# Altium PCB stm32dev.PcbDoc
Units mm, origin at the board's own origin, x right, y up, seen from the top; angles counter-clockwise.
Board outline 57 x 44 mm, 4 copper layers (Top Layer (Signal), Int1 (GND), Int2 (PWR), Bottom Layer (Signal)), stack 1.57 mm thick; 42 components, 50 nets, 191 pads, 142 vias.
Unrouted connection lines stored in the file: 5.
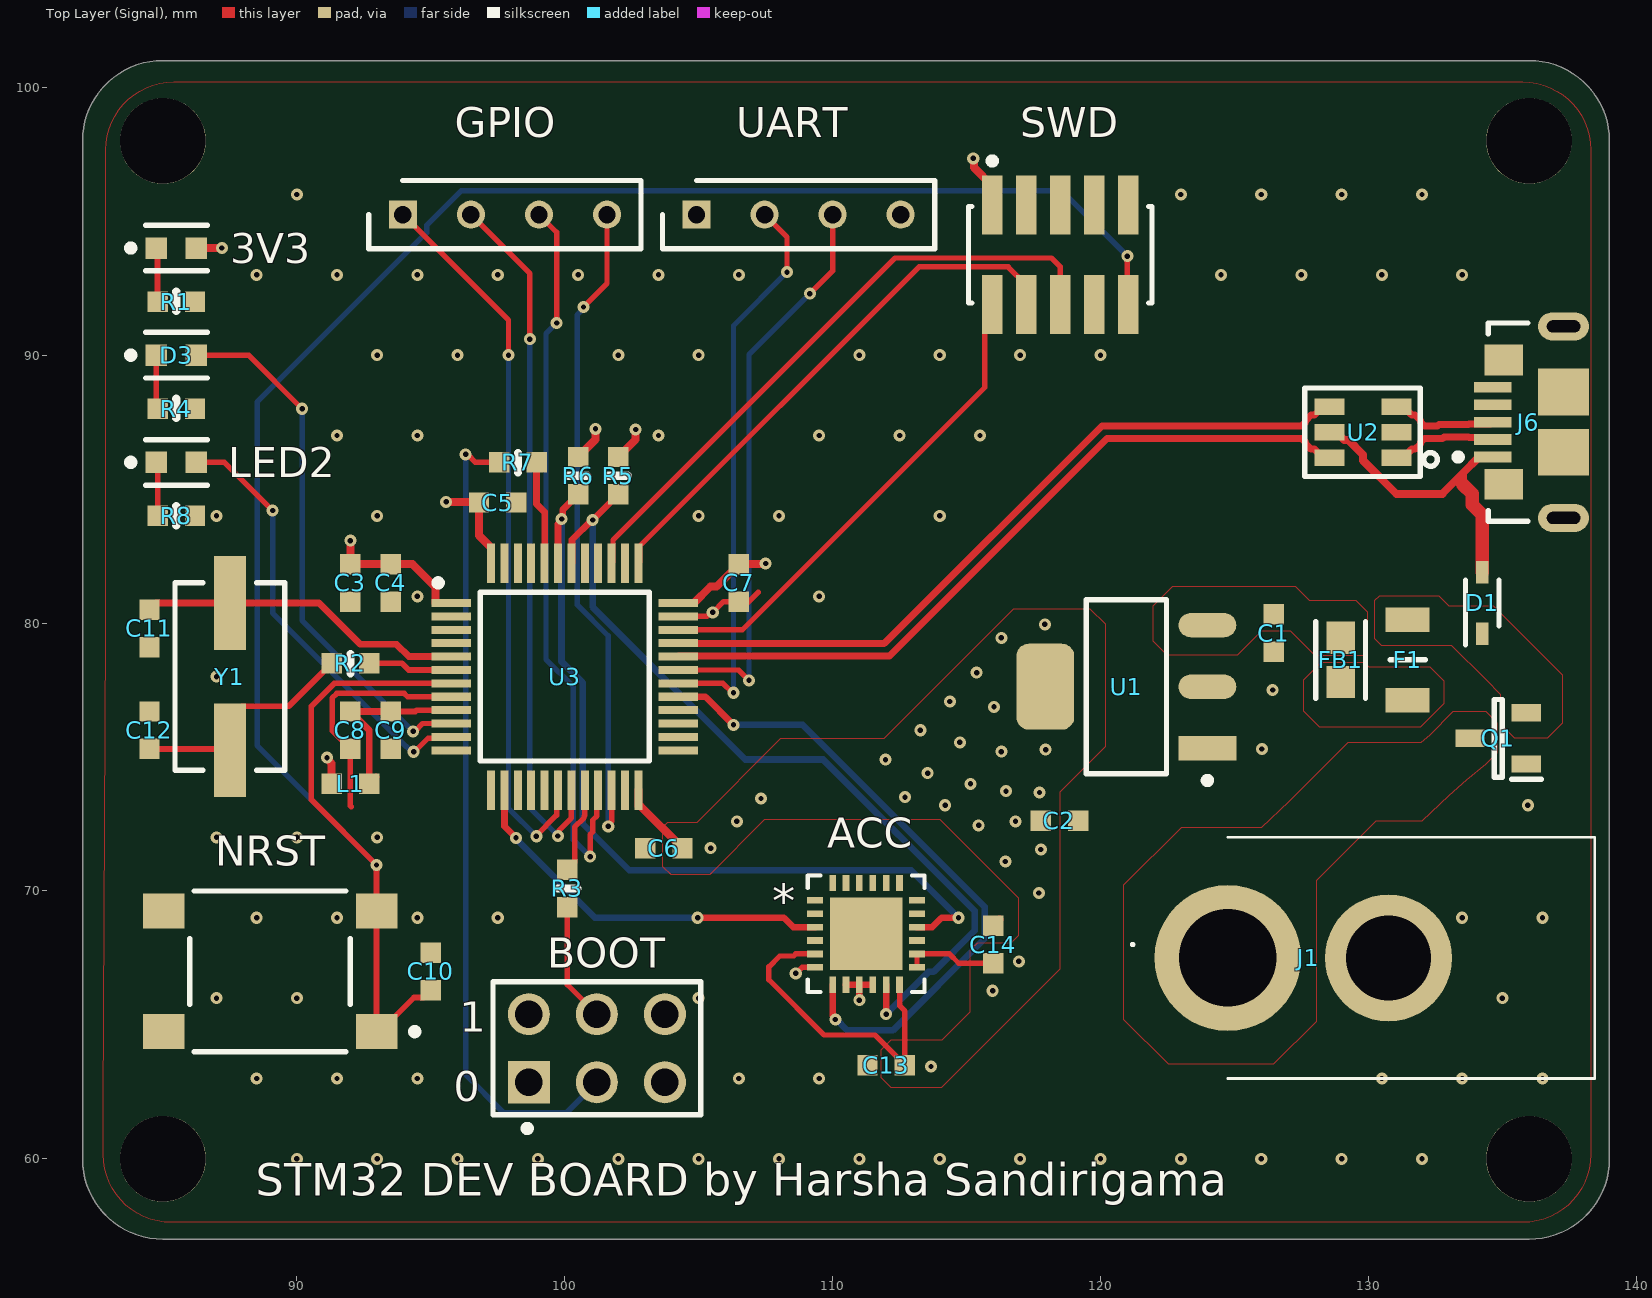
[diagram p0: Top Layer (Signal) view]
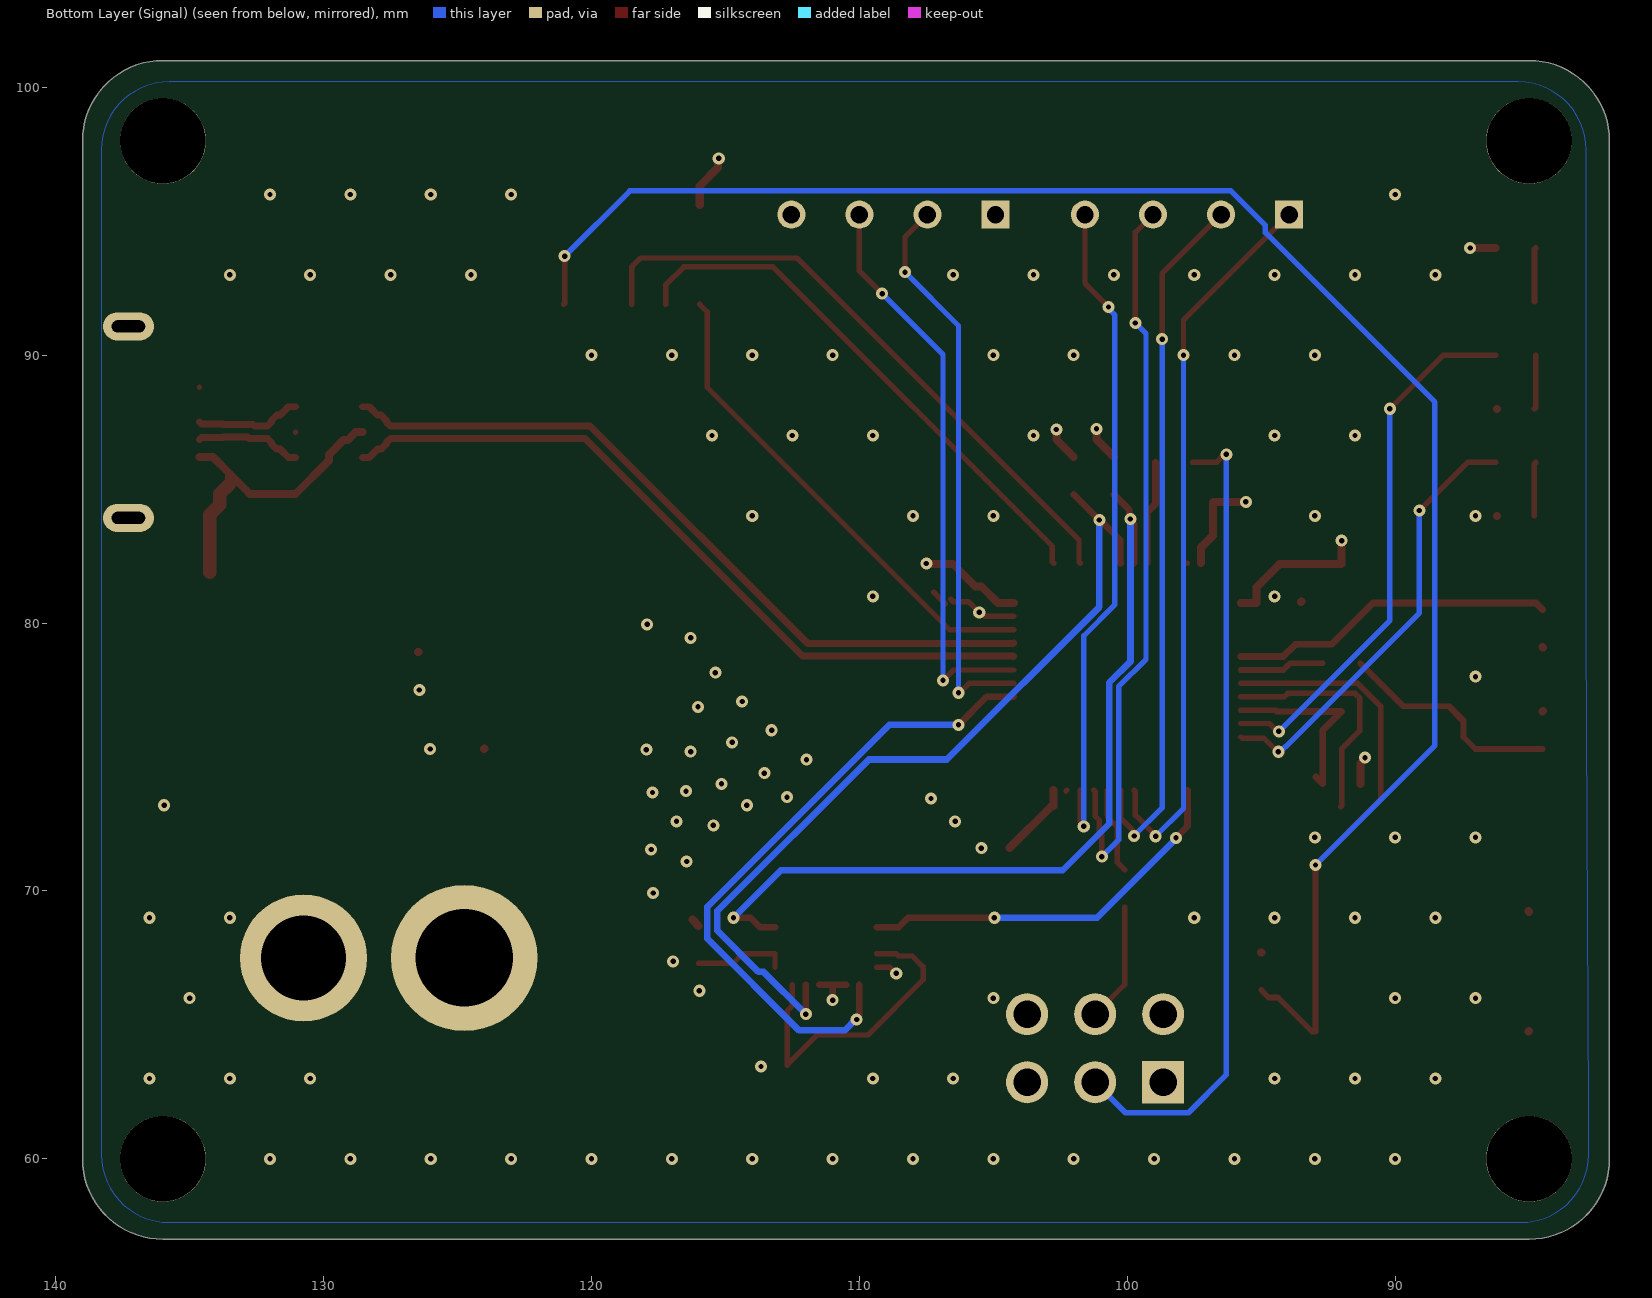
[diagram p1: Bottom Layer (Signal) view, seen from below]

## Layer stack, top to bottom
Top Solder: solder mask 0.0254, SM-001, Dk 4
Top Layer (Signal): signal copper 0.035
Dielectric 1: prepreg 0.2, PP-017, Dk 4.6
Int1 (GND): signal copper 0.0175
Dielectric 3: core 1.065, Core-039, Dk 4.6
Int2 (PWR): signal copper 0.0175
Dielectric 5: prepreg 0.2, PP-017, Dk 4.6
Bottom Layer (Signal): signal copper 0.035
Bottom Solder: solder mask 0.0254, SM-001, Dk 4

## Board outline
82,60 82,98 cw(c85,98) 85,101 136,101 cw(c136,98) 139,98 139,60 cw(c136,60) 136,57 85,57 cw(c85,60)

## Design rules (kind name [scope] priority, off if disabled: settings)
AssemblyTestPointUsage [All] p0: scope1count=1 scope1_0_kind=Board scope1_0_value=Board scope2count=1 scope2_0_kind=Board scope2_0_value=Board commentlength=0
AssemblyTestpoint [All] p0: scope1count=1 scope1_0_kind=Board scope1_0_value=Board scope2count=1 scope2_0_kind=Board scope2_0_value=Board commentlength=0
BoardOutlineClearance [All] p0: scope1count=1 scope1_0_kind=Board scope1_0_value=Board scope2count=1 scope2_0_kind=Board scope2_0_value=Board commentlength=0 gap=0.3
BoardOutlineClearance [All] p1: gap=0.3 ignorepadtopadclearanceinfootprint=FALSE
Clearance [All] p0: scope1count=1 scope1_0_kind=Board scope1_0_value=Board scope2count=1 scope2_0_kind=Board scope2_0_value=Board commentlength=0 gap=0.254
Clearance [All] p1: gap=0.254 ignorepadtopadclearanceinfootprint=TRUE except(0.127: Arc-Arc Arc-Track Track-Track SMDPad-SMDPad; 0.2: Arc-SMDPad Track-SMDPad)
ComponentClearance [All] p0: scope1count=1 scope1_0_kind=Board scope1_0_value=Board scope2count=1 scope2_0_kind=Board scope2_0_value=Board commentlength=0 gap=0.102 collisioncheckmode=3
ComponentClearance [All] p1: gap=0.102 collisioncheckmode=3 verticalgap=0.102 showdistances=TRUE
DiffPairsRouting [All] p0: scope1count=1 scope1_0_kind=Board scope1_0_value=Board scope2count=1 scope2_0_kind=Board scope2_0_value=Board commentlength=0
DiffPairsRouting [All] p1: maxlimit=0.203 minlimit=0.102 mostfreqgap=0.203 toplayer_mingap=0.203 toplayer_minwidth=0.26 toplayer_maxwidth=0.26 toplayer_prefwidth=0.26 bottomlayer_mingap=0.203 bottomlayer_minwidth=0.26 bottomlayer_maxwidth=0.26 bottomlayer_prefwidth=0.26 impedanceprofiledriven=TRUE impedanceprofileid={1C4CB671-A8B7-4B95-AC9F-C94278357B87} impedanceprofilevalue=90.000000 maxuncoupledlength=12.7
FabricationTestPointUsage [All] p0: scope1count=1 scope1_0_kind=Board scope1_0_value=Board scope2count=1 scope2_0_kind=Board scope2_0_value=Board commentlength=0 valid=0 allowmultiple=FALSE
FabricationTestpoint [All] p0: scope1count=1 scope1_0_kind=Board scope1_0_value=Board scope2count=1 scope2_0_kind=Board scope2_0_value=Board commentlength=0 side=3 testpointundercomponent=TRUE minsize=1.016 maxsize=2.54 preferedsize=1.524 minholesize=0 maxholesize=1.016 preferedholesize=0.813 testpointgrid=0.025
FanoutControl Fanout_Default [All] p0: scope1count=1 scope1_0_kind=Board scope1_0_value=Board scope2count=1 scope2_0_kind=Board scope2_0_value=Board commentlength=30 // Fanout_Default (Default Rule)
FanoutControl Fanout_Small [All] p0 off: scope1count=1 scope1_0_kind=Board scope1_0_value=Board scope2count=1 scope2_0_kind=Board scope2_0_value=Board commentlength=84 // Protel DXP Scope 1 Expression Was: (CompPinCount < 5)   Fanout_Small (Default Rule)
FanoutControl Fanout_SOIC [All] p0 off: scope1count=1 scope1_0_kind=Board scope1_0_value=Board scope2count=1 scope2_0_kind=Board scope2_0_value=Board commentlength=71 // Protel DXP Scope 1 Expression Was: IsSOIC   Fanout_SOIC (Default Rule)
FanoutControl Fanout_LCC [All] p0 off: scope1count=1 scope1_0_kind=Board scope1_0_value=Board scope2count=1 scope2_0_kind=Board scope2_0_value=Board commentlength=69 // Protel DXP Scope 1 Expression Was: IsLCC   Fanout_LCC (Default Rule)
FanoutControl Fanout_BGA [All] p0 off: scope1count=1 scope1_0_kind=Board scope1_0_value=Board scope2count=1 scope2_0_kind=Board scope2_0_value=Board commentlength=69 // Protel DXP Scope 1 Expression Was: IsBGA   Fanout_BGA (Default Rule)
Height [All] p0: scope1count=1 scope1_0_kind=Board scope1_0_value=Board scope2count=1 scope2_0_kind=Board scope2_0_value=Board commentlength=0
Height [All] p1: minheight=0 maxheight=1816.048 prefheight=12.7
HoleSize [All] p0: scope1count=1 scope1_0_kind=Board scope1_0_value=Board scope2count=1 scope2_0_kind=Board scope2_0_value=Board commentlength=0 absolutevalues=TRUE maxlimit=6.3 minlimit=0.2 maxpercent=80.000 minpercent=20.000
HoleSize [All] p1: absolutevalues=TRUE maxlimit=6.3 minlimit=0.2 maxpercent=80.000 minpercent=20.000
HoleToHoleClearance [All] p0: scope1count=1 scope1_0_kind=Board scope1_0_value=Board scope2count=1 scope2_0_kind=Board scope2_0_value=Board commentlength=0
HoleToHoleClearance [All] p1: gap=0.5 allowstackedmicrovias=FALSE
LayerPairs [All] p0: scope1count=1 scope1_0_kind=Board scope1_0_value=Board scope2count=1 scope2_0_kind=Board scope2_0_value=Board commentlength=0 enforce=TRUE
MinimumAnnularRing [All] p0: scope1count=1 scope1_0_kind=Board scope1_0_value=Board scope2count=1 scope2_0_kind=Board scope2_0_value=Board commentlength=0 minimumring=0.13
MinimumAnnularRing [All] p1: minimumring=0.13
MinimumSolderMaskSliver [All] p0: scope1count=1 scope1_0_kind=Board scope1_0_value=Board scope2count=1 scope2_0_kind=Board scope2_0_value=Board commentlength=0
MinimumSolderMaskSliver [All] p1: minsoldermaskwidth=0
NetAntennae [All] p0: scope1count=1 scope1_0_kind=Board scope1_0_value=Board scope2count=1 scope2_0_kind=Board scope2_0_value=Board commentlength=0
PasteMaskExpansion [All] p0: scope1count=1 scope1_0_kind=Board scope1_0_value=Board scope2count=1 scope2_0_kind=Board scope2_0_value=Board commentlength=0 expansion=0
PlaneClearance [All] p0: scope1count=1 scope1_0_kind=Board scope1_0_value=Board scope2count=1 scope2_0_kind=Board scope2_0_value=Board commentlength=0 clearance=0.102
PlaneClearance [All] p1: clearance=0.102
PlaneConnect [All] p0: scope1count=1 scope1_0_kind=Board scope1_0_value=Board scope2count=1 scope2_0_kind=Board scope2_0_value=Board commentlength=0 planeconnectstyle=Relief reliefexpansion=0.3 reliefentries=4 reliefconductorwidth=0.102 reliefairgap=0.102
PlaneConnect PlaneConnectPowerPads [All] p0: scope1count=1 scope1_0_kind=PadClass scope1_0_value=PowerPads scope2count=1 scope2_0_kind=Board scope2_0_value=Board commentlength=0 planeconnectstyle=Direct reliefexpansion=0.508 reliefentries=4 reliefconductorwidth=0.254 reliefairgap=0.254
PlaneConnect PlaneConnectPowerPads [InPadClass('PowerPads')] p1: planeconnectstyle=Direct reliefexpansion=0.508 reliefentries=4 reliefconductorwidth=0.254 reliefairgap=0.254
PlaneConnect [All] p2: pad.planeconnectstyle=Relief pad.reliefexpansion=0.3 pad.reliefentries=4 pad.reliefconductorwidth=0.102 pad.reliefairgap=0.102 via.planeconnectstyle=Direct via.reliefexpansion=0.3 via.reliefentries=4 via.reliefconductorwidth=0.127 via.reliefairgap=0.127
PolygonConnect [All] p0: scope1count=1 scope1_0_kind=Board scope1_0_value=Board scope2count=1 scope2_0_kind=Board scope2_0_value=Board commentlength=0 connectstyle=Relief reliefconductorwidth=0.2 reliefentries=4 polygonreliefangle="90 Angle"
PolygonConnect PolygonConnectPowerPads [All] p0 off: scope1count=1 scope1_0_kind=Board scope1_0_value=Board scope2count=1 scope2_0_kind=Board scope2_0_value=Board commentlength=64 connectstyle=Direct reliefconductorwidth=0.254 reliefentries=4 polygonreliefangle="90 Angle" // Protel DXP Scope 2 Expression Was: (InPadClass('PowerPads'))
PolygonConnect PolygonConnectPowerPads [All vs (InPadClass('PowerPads'))] p1: connectstyle=Direct reliefconductorwidth=0.254 reliefentries=4 polygonreliefangle="90 Angle" airgapwidth=0.254
PolygonConnect [All] p2: thpad.connectstyle=Relief thpad.reliefconductorwidth=0.2 thpad.reliefentries=4 thpad.polygonreliefangle="90 Angle" thpad.airgapwidth=0.2 smdpad.connectstyle=Relief smdpad.reliefconductorwidth=0.2 smdpad.reliefentries=4 smdpad.polygonreliefangle="90 Angle" smdpad.airgapwidth=0.2 via.connectstyle=Direct via.reliefconductorwidth=0.127 via.reliefentries=4 via.polygonreliefangle="90 Angle" via.airgapwidth=0.127
RoutingCorners [All] p0: scope1count=1 scope1_0_kind=Board scope1_0_value=Board scope2count=1 scope2_0_kind=Board scope2_0_value=Board commentlength=0 cornerstyle=45-Degree minsetback=2.54 maxsetback=2.54
RoutingLayers [All] p0: scope1count=1 scope1_0_kind=Board scope1_0_value=Board scope2count=1 scope2_0_kind=Board scope2_0_value=Board commentlength=0 top layer=Automatic mid layer 1=Automatic mid layer 2=Automatic bottom layer=Automatic
RoutingPriority [All] p0: scope1count=1 scope1_0_kind=Board scope1_0_value=Board scope2count=1 scope2_0_kind=Board scope2_0_value=Board commentlength=0
RoutingTopology [All] p0: scope1count=1 scope1_0_kind=Board scope1_0_value=Board scope2count=1 scope2_0_kind=Board scope2_0_value=Board commentlength=0 topology=Shortest
RoutingVias [All] p0: scope1count=1 scope1_0_kind=Board scope1_0_value=Board scope2count=1 scope2_0_kind=Board scope2_0_value=Board commentlength=0 holewidth=0.2 width=0.45 viastyle="Through Hole" minholewidth=0.2 minwidth=0.45 maxholewidth=6.3 maxwidth=6.55
RoutingVias [All] p1: holewidth=0.2 width=0.45 viastyle="Through Hole" minholewidth=0.2 minwidth=0.45 maxholewidth=6.3 maxwidth=6.55
ShortCircuit [All] p0: scope1count=1 scope1_0_kind=Board scope1_0_value=Board scope2count=1 scope2_0_kind=Board scope2_0_value=Board commentlength=0 allowed=FALSE
SilkToBoardRegionClearance [All] p0: scope1count=1 scope1_0_kind=Board scope1_0_value=Board scope2count=1 scope2_0_kind=Board scope2_0_value=Board commentlength=0
SilkToSilkClearance [All] p0: scope1count=1 scope1_0_kind=Board scope1_0_value=Board scope2count=1 scope2_0_kind=Board scope2_0_value=Board commentlength=0
SilkToSilkClearance [All] p1: silktosilkclearance=0
SilkToSolderMaskClearance [All] p0 off: scope1count=1 scope1_0_kind=Board scope1_0_value=Board scope2count=1 scope2_0_kind=Board scope2_0_value=Board commentlength=44 // Protel DXP Scope 1 Expression Was: IsPad
SilkToSolderMaskClearance [IsPad] p1: minsilkscreentomaskgap=0.102 clearancetoexposedcopper=TRUE
SolderMaskExpansion [All] p0: scope1count=1 scope1_0_kind=Board scope1_0_value=Board scope2count=1 scope2_0_kind=Board scope2_0_value=Board commentlength=0 expansion=0.075
SolderMaskExpansion [All] p1: expansion=0.075 istentingtop=FALSE
UnRoutedNet [All] p0: scope1count=1 scope1_0_kind=Board scope1_0_value=Board scope2count=1 scope2_0_kind=Board scope2_0_value=Board commentlength=0
UnpouredPolygon [All] p0: scope1count=1 scope1_0_kind=Board scope1_0_value=Board scope2count=1 scope2_0_kind=Board scope2_0_value=Board commentlength=0
Width [All] p0: scope1count=1 scope1_0_kind=Board scope1_0_value=Board scope2count=1 scope2_0_kind=Board scope2_0_value=Board commentlength=0 maxlimit=1816.048 minlimit=0.102 preferedwidth=0.3
Width [All] p1: maxlimit=1816.048 minlimit=0.102 preferedwidth=0.3 toplayer_minwidth=0.2 midlayer1_prefwidth=0.102 midlayer2_prefwidth=0.102 bottomlayer_minwidth=0.2 minimp=50.000000 maximp=50.000000 favimp=50.000000
20 further rules are at their usual default settings.

## Classes and differential pairs
differential pair USB_DATA: +USB_DATA_P -USB_DATA_N
differential pair " ": +USB_CONN_D_P -USB_CONN_D_N

## Components (designator, comment, footprint, x,y, rotation, side; value= is the part's Value field where it differs from the comment)
3V3 "LTST-C191KFKT" Lite-On_0_MFG 85.5,94 r0 top (schematic designator D2)
ACC "IIS328DQ" QFN-24_4X4MM_STM 111.25,68.4 r0 top (schematic designator U4)
BOOT "67996-406HLF" Amphenol_ICC_-_FCI_0_MFG 101.2,64.13 r0 top (schematic designator J7)
C1 "4.7uF" "0603C - HD" 126.465,79.625 r90 top
C2 "4.7uF" "0603C - HD" 118.465,72.625 r180 top
C3 "10uF" "0603C - HD" 92,81.5 r90 top
C4 "100nF" "0603C - HD" 93.5,81.5 r90 top
C5 "100nF" "0603C - HD" 97.5,84.5 r180 top
C6 "100nF" "0603C - HD" 103.699,71.6 r0 top
C7 "100nF" "0603C - HD" 106.5,81.5 r90 top
C8 "1uF" "0603C - HD" 92,76 r90 top
C9 "10nF" "0603C - HD" 93.5,76 r90 top
C10 "10nF" "0603C - HD" 95,67 r90 top
C11 "27pF" "0603C - HD" 84.5,79.802 r90 top
C12 "27pF" "0603C - HD" 84.5,76 r270 top
C13 "10uF" "0603C - HD" 112,63.5 r0 top
C14 "100nF" "0603C - HD" 116,68 r270 top
D1 "PMEG4005CEJX" SODFL2512X80N 134.25,80.75 r90 top
D3 "LTST-C191KFKT" Lite-On_0_MFG 85.5,90 r0 top
F1 "250mA" FUSC3115X66N 131.465,78.625 r270 top
FB1 "MPZ1608Y101BTA00" TDK_MPZ1608-0_8_IPC_A 128.965,78.625 r90 top
GPIO "TS-104-T-AA" HDRV4W46P0X254_1X4_1016X254X808P 93.96,95.25 r0 top (schematic designator J2)
J1 "12V" PJ037AH 124.75,67.5 r180 top
J6 "USB3075-30-A" Global_Connector_Technology_USB3075-30-A_0 137.25,87.5 r90 top
L1 "39nH" "0603L - HD" 92,74 r0 top
LED2 "LTST-C191KFKT" Lite-On_0_MFG 85.5,86 r0 top (schematic designator D4)
NRST "PTS645SM43SMTR92LFS" "C&K_0_MFG - duplicate" 89,67 r180 top (schematic designator SW1)
Q1 "MOSFET P-CH" SOT96P240X110-3N 134.85,75.7 r180 top
R1 "RMCF0603FT1K50" "0603R - HD" 85.5,92 r180 top
R2 "47R" "0603R - HD" 92,78.5 r0 top
R3 "RNCF0603BTE10K0" "0603R - HD" 100.1,70.098 r90 top
R4 "RMCF0603FT1K50" "0603R - HD" 85.5,88 r180 top
R5 "RMCF0603FT2K20" "0603R - HD" 102,85.5 r270 top
R6 "RMCF0603FT2K20" "0603R - HD" 100.5,85.5 r270 top
R7 "RNCF0603BTE10K0" "0603R - HD" 98.251,86 r0 top
R8 "RMCF0603FT1K50" "0603R - HD" 85.5,84 r180 top
SWD "GRPB052VWQS-RC" Sullins_GRPB052VWQS-RC_MFG 118.5,93.75 r0 top (schematic designator J5)
U1 "ZLDO1117G33TA" Diodes_SOT223_IPC_A 120.965,77.625 r180 top
U2 "82400102" SOT23_6L 129.8,87.125 r180 top
U3 "STM32L151C8T6A" QFP50P900X900X160-48N 100,78 r0 top
UART "TS-104-T-AA" HDRV4W46P0X254_1X4_1016X254X808P 104.92,95.25 r0 top (schematic designator J3)
Y1 "16MHz" ECS_Inc._ECS-160-20-3X-TR_0 87.5,78 r270 top

## Footprints (in the part's own frame and the unit in brackets; to place one, negate y for a bottom-side part, rotate by r counter-clockwise, add the part's x,y. Pads: shape width x height; smd on the part's side, far side on the other; paste and mask are expansions set on the pad)
"0603C - HD" [mil] "Capacitor 0603 [Imperial]"
  rect 30x30 smd: 1(-27.5,0) 2(27.5,0)
"0603L - HD" [mil] "Inductor 0603 [Imperial]"
  rect 30x30 smd: 1(-27.5,0) 2(27.5,0)
"0603R - HD" [mil]
  rect 30x30 smd: 1(-27.5,0) 2(27.5,0)
  silkscreen extent 0,-15 0,14
Amphenol_ICC_-_FCI_0_MFG [mm]
  rect 1.57x1.57 hole 1.02 paste-1000 mask+0: 1(-2.54,-1.27)
  round 1.57 hole 1.02 paste-1000 mask+0: 2(-2.54,1.27) 3(0,-1.27) 4(0,1.27) 5(2.54,-1.27) 6(2.54,1.27)
  silkscreen extent -3.87,-3.12 3.87,2.48
"C&K_0_MFG - duplicate" [mm]
  rect 1.55x1.3 smd paste+0 mask+0: 1(-3.975,2.25) 2(3.975,2.25) 3(-3.975,-2.25) 4(3.975,-2.25)
  silkscreen extent -5.53,-3 3,3
Diodes_SOT223_IPC_A [mm]
  rect 2.16x0.912 smd paste+0 mask+0: 1(-3.026,2.3)
  rrect100% 2.16x0.912 smd paste+0 mask+0: 2(-3.026,0) 3(-3.026,-2.3)
  rrect42% 2.16x3.212 smd paste+0 mask+0: 4(3.026,0)
  silkscreen extent -3.15,-3.25 1.5,3.62
ECS_Inc._ECS-160-20-3X-TR_0 [mm]
  rect 3.5x1.2 smd paste+0 mask+0: 1(-2.75,0) 2(2.75,0)
  silkscreen extent -3.5,-2.05 3.5,2.05
FUSC3115X66N [mm]
  rect 0.92x1.65 smd: 1(-1.505,0) 2(1.505,0)
  silkscreen extent 0,-0.66 0,0.66
Global_Connector_Technology_USB3075-30-A_0 [mm]
  rect 0.4x1.4 smd paste+0 mask+0: 1(-1.3,2.615) 2(-0.65,2.615) 3(0,2.615) 4(0.65,2.615) 5(1.3,2.615)
  rect 1.15x1.45 smd paste+0 mask+0: 6(-2.32,2.195) 7(2.32,2.195)
  oval 1.05x1.9 hole 1.25 slot 0.45 at 0 deg paste-1000 mask+0: 8(-3.575,-0.035) 11(3.575,-0.035)
  rect 1.75x1.9 smd paste+0 mask+0: 9(-1.125,-0.035) 10(1.125,-0.035)
  silkscreen extent -3.7,1.3 3.7,4.02
HDRV4W46P0X254_1X4_1016X254X808P [mm]
  rect 1.05x1.05 hole 0.65: 1(0,0)
  round 1.05 hole 0.65: 2(2.54,0) 3(5.08,0) 4(7.62,0)
  silkscreen extent -1.27,-1.27 8.89,1.27
Lite-On_0_MFG [mm]
  rect 0.8x0.8 smd paste+0 mask+0: 1(-0.75,0) 2(0.75,0)
  silkscreen extent -1.82,-0.85 1.15,0.85
PJ037AH [mm]
  round 5.46 hole 3.64: 1(0,0)
  round 4.74 hole 3.16: 2(-6,0)
  silkscreen extent -13.7,-4.5 3.6,4.5
QFN-24_4X4MM_STM [mm]
  rect 0.6x0.25 smd paste+0 mask+0: 1(-1.9,1.25) 2(-1.9,0.75) 3(-1.9,0.25) 4(-1.9,-0.25) 5(-1.9,-0.75) 6(-1.9,-1.25) 13(1.9,-1.25) 14(1.9,-0.75) 15(1.9,-0.25) 16(1.9,0.25) 17(1.9,0.75) 18(1.9,1.25)
  rect 0.25x0.6 smd paste+0 mask+0: 7(-1.25,-1.9) 8(-0.75,-1.9) 9(-0.25,-1.9) 10(0.25,-1.9) 11(0.75,-1.9) 12(1.25,-1.9) 19(1.25,1.9) 20(0.75,1.9) 21(0.25,1.9) 22(-0.25,1.9) 23(-0.75,1.9) 24(-1.25,1.9)
  rect 2.7x2.7 smd paste-1.337 mask+0: 25(0,0)
  silkscreen extent -2.18,-2.18 2.18,2.18
QFP50P900X900X160-48N [mm]
  rect 1.475x0.3 smd: 1(-4.238,2.75) 2(-4.238,2.25) 3(-4.238,1.75) 4(-4.238,1.25) 5(-4.238,0.75) 6(-4.238,0.25) 7(-4.238,-0.25) 8(-4.238,-0.75) 9(-4.238,-1.25) 10(-4.238,-1.75) 11(-4.238,-2.25) 12(-4.238,-2.75) 25(4.238,-2.75) 26(4.238,-2.25) 27(4.238,-1.75) 28(4.238,-1.25) 29(4.238,-0.75) 30(4.238,-0.25) 31(4.238,0.25) 32(4.238,0.75) 33(4.238,1.25) 34(4.238,1.75) 35(4.238,2.25) 36(4.238,2.75)
  rect 0.3x1.475 smd: 13(-2.75,-4.238) 14(-2.25,-4.238) 15(-1.75,-4.238) 16(-1.25,-4.238) 17(-0.75,-4.238) 18(-0.25,-4.238) 19(0.25,-4.238) 20(0.75,-4.238) 21(1.25,-4.238) 22(1.75,-4.238) 23(2.25,-4.238) 24(2.75,-4.238) 37(2.75,4.238) 38(2.25,4.238) 39(1.75,4.238) 40(1.25,4.238) 41(0.75,4.238) 42(0.25,4.238) 43(-0.25,4.238) 44(-0.75,4.238) 45(-1.25,4.238) 46(-1.75,4.238) 47(-2.25,4.238) 48(-2.75,4.238)
  silkscreen extent -4.85,-3.15 3.15,3.62
SODFL2512X80N [mm]
  rect 0.84x0.46 smd: 1(-1.15,0) 2(1.15,0)
  silkscreen extent -1.57,-0.63 0.85,0.63
SOT23_6L [mil] "SOT23_6L, 6-Leads, Body 3.60x2.9mm, Pitch 0.95mm"
  rect 44x24 smd: 1(-49.21,37.4) 2(-49.21,0) 3(-49.21,-37.4) 4(49.21,-37.4) 5(49.21,0) 6(49.21,37.4)
  silkscreen extent -109,-65 86,65
SOT96P240X110-3N [mm]
  rect 1.1x0.65 smd: 1(-1.05,0.96) 2(-1.05,-0.96) 3(1.05,0)
  silkscreen extent -1.6,-1.45 0.15,1.54
Sullins_GRPB052VWQS-RC_MFG [mm]
  rect 0.76x2.2 smd paste+0 mask+0: 1(-2.54,1.85) 2(-2.54,-1.85) 3(-1.27,1.85) 4(-1.27,-1.85) 5(0,1.85) 6(0,-1.85) 7(1.27,1.85) 8(1.27,-1.85) 9(2.54,1.85) 10(2.54,-1.85)
  silkscreen extent -3.42,-1.8 3.42,3.62
TDK_MPZ1608-0_8_IPC_A [mm]
  rect 1.206x1.058 smd paste+0 mask+0: 1(-0.826,0) 2(0.826,0)
  silkscreen extent -1.43,-0.93 1.43,0.93

## Part data
3V3 D3 LED2: "Orange 0603 130° Water Clear 90 mcd 2 V SMT Rectangular Flat Top LED"
ACC: "High Performance Low power 3 axis accelerometer for industrial applications"
BOOT: "CONN HEADER VERT 6POS 2.54MM"
C1 C2: library part C1608X7S1A475K080AC, "Cap Ceramic 4.7uF 10V X7S 10% SMD 0603 125°C Punched Paper T/R"
C3 C13: library part 06036D106MAT2A, "AVX - 06036D106MAT2A - SMD Multilayer Ceramic Capacitor, 10 µF, 6.3 V, 0603 [1608 Metric], ± 20%, X5R, AVX 0603 MLCC"
C4 C5 C6 C7 C14: library part CL10B104KB8VPJC, "0.1 µF ±10% 50V Ceramic Capacitor X7R 0603 (1608 Metric)"
C8: library part 0603BB105K160YT, "CAP CER 1UF 16V X7R 0603"
C9 C10: library part CL10B103KB8WPJC, "Capacitor Ceramic 0.01uF 10% 50V 2-Pin Surface Mount T/R"
C11 C12: library part 06035A270JAT2A, "CAP MLCC, 27PF, 50V, C0G/NP0, 5%, 0603"
D1: "Rectifier Diode Schottky 40V 0.5A 1.8ns Automotive 2-Pin SOD-323F T/R"
F1: library part C1Q250, "Fuse Chip Very Fast Acting 0.25A 125V SMD Solder Pad 1206 Ceramic T/R CE/CSA/cULus"
FB1: "Ind Chip Bead Multi-Layer 100Ohm 25% 100MHz Ferrite 2A 0603 Punched Paper T/R"
GPIO UART: "Connector"
J1: library part PJ-037AH, "CONN PWR JACK 2X5.5MM SOLDER"
J6: "Conn Micro USB Type B RCP 2Power/3Signal POS 0.65mm Solder RA SMD 5 Terminal 1 Port T/R"
L1: library part HK160839NJ-T, "Ind High Frequency Chip Multi-Layer 39nH 5% 100MHz 12Q-Factor Ceramic 300mA 0603 T/R"
NRST: "SWITCH TACTILE SPST-NO 0.05A 12V"
Q1: library part DMP3130LQ-7, "Trans MOSFET P-CH 30V 3.5A Automotive 3-Pin SOT-23 T/R"
R1 R4 R8: "Res Thick Film 0603 1.5K Ohm 1% 0.1W(1/10W) ±100ppm/C Pad SMD Automotive T/R"
R2: library part RCS060347R0FKEA, "RES SMD 47 OHM 1% 1/4W 0603"
R3 R7: "RES 10K OHM 0.1% 1/10W 0603"
R5 R6: "Res Thick Film 0603 2.2K Ohm 1% 0.1W(1/10W) ±100ppm/C Pad SMD Automotive T/R"
SWD: "Male, 10 C, SMT, .050\" CC; 3.00mm Head/5.10mm Tail, Sf Mt; No GP, Nylon 9T, Brass, 105 C"
U1: "LDO Regulator Pos 3.3V 1A 4-Pin(3+Tab) SOT-223 T/R / IC REG LDO 3.3V 1A SOT223"
U2: library part CMP-1486-00007-1, "TVS Diode Array WE-TVS 2-Ch+VDD 5V SOT23"
U3: library part STM32L151C8T6A_1, "MCU 32-bit ARM Cortex M3 RISC 64KB Flash 2.5V/3.3V 48-Pin LQFP Tray"
Y1: library part Crys_ECS_Inc._ECS-160-20-3X-TR_eec, "Crystals 16MHz 20pF 50ppm -10C +70C"

## Free pads (board coordinates)
  round 3.2 hole 3.2: 1(85,98) 2(85,60) 3(136,60) 4(136,98)

## Via types
v1: diameter 0.45, hole 0.2, Top Layer (Signal) to Bottom Layer (Signal), tented both sides, 142 vias

## Nets (pads, with @x,y where several pads share a name; then routed paths per layer and width w, separated by ;. In a path a pad name is that pad's centre, name@x,y a point inside that pad or via, vN(x,y) a via of type N, cw(c..) or ccw(c..) an arc to the next point about the centre after c; other vN are vias at no path point)
3V3: 3V3.2 ACC.5 ACC.12 ACC.13 ACC.14 BOOT.1 BOOT.2 C2.2 C3.2 C4.2 C5.2 C6.2 C7.2 C13.2 C14.2 L1.1 R5.1 R6.1 SWD.1 U1.4 U3.1 U3.24 U3.36 U3.48 UART.1 | length 38.1
  Top Layer (Signal) w0.2: ACC.5 108.628,67.65 108.549,67.571 108.027,67.571 107.621,67.165 107.621,66.685 109.685,64.621 111.578,64.621 C13.2 112.699,65.52 112.5,65.719 ACC.12 ; ACC.13 ACC.14 114.36,67.65 114.709,67.302 C14.2
  Top Layer (Signal) w0.3: 3V3.2 v1(87.2,94) ; v1(91.125,74.975) 91.125,74.934 91.302,74.758 L1.1 ; v1(92,83.075) C3.2 94.314,82.199 95.175,81.338 95.175,80.75 U3.1 ; v1(95.575,84.525) 95.587,84.513 96.789,84.513 C5.2 96.801,83.274 97.25,82.825 U3.48 ; R6.1 101.15,86.849 v1(101.15,87.25) ; R5.1 102.65,86.849 v1(102.65,87.225) ; U3.24 102.75,73.175 102.822,73.175 C6.2 ; U3.36 104.825,80.75 105.434,81.359 105.66,81.359 106.513,82.212 107.487,82.212 v1(107.5,82.225) ; v1(115.25,97.35) 115.279,97.321 115.279,97.001 115.96,96.32 SWD.1
  other v1: 113.675,63.45 115.975,66.275 116.95,67.375 117.7,69.925 116.45,71.1 117.775,71.55 105.45,71.6 115.45,72.45 106.425,72.6 116.825,72.6 114.2,73.2 107.325,73.45 112.7,73.5 117.725,73.675 116.475,73.725 115.15,74 113.55,74.4 111.975,74.9 116.3,75.2 117.95,75.275 114.75,75.55 113.275,76 116.025,76.875 114.375,77.075 115.375,78.15 116.3,79.45 117.925,79.95
3V3A: C8.2 C9.2 L1.2 U3.9 | length 7.1
  Top Layer (Signal) w0.21: C9.2 94.427,76.699 94.479,76.75 U3.9
  Top Layer (Signal) w0.25: L1.2@92.954,74.256 L1.2 92.698,74.778 92.706,74.786 92.706,75.992 C8.2 C9.2
5V: D1.2 J6.1 U2.5 | length 11.7
  Top Layer (Signal) w0.3: U2.5 128.804,87.125 129.099,86.83 129.254,86.83 129.8,86.284 129.8,86.066 131.041,84.825 132.76,84.825 133.525,85.59 ; 133.525,85.175 133.525,85.59 ; J6.1 134.135,86.2 133.525,85.59
  Top Layer (Signal) w0.5: 133.525,85.175 133.879,84.821 133.879,84.42 134.25,84.049 D1.2
12V: J1.1 Q1.3
BOOT0: R7.2 U3.44 | length 3.9
  Top Layer (Signal) w0.25: R7.2 98.95,84.447 99.25,84.147 U3.44
BOOT1: R3.2 U3.20 | length 3.2
  Top Layer (Signal) w0.2: R3.2 100.37,71.067 100.37,72.382 100.719,72.731 100.719,72.786 100.75,72.817 U3.20
GND: ACC.4 ACC.6 ACC.8 ACC.9 ACC.10 ACC.15 BOOT.5 BOOT.6 C1.1 C2.1 C3.1 C4.1 C5.1 C6.1 C7.1 C8.1 C9.1 C10.2 C11.1 C12.1 C13.1 C14.1 J1.2 J6.5 NRST.2 NRST.4 Q1.1 R1.1 R4.1 R8.1 SWD.3 SWD.5 SWD.9 U1.1 U2.2 U3.8 U3.23 U3.35 U3.47 UART.4 | length 15.1
  Top Layer (Signal) w0.2: C8.1 C8.1 ; 92.025,73.15 92,73.175 C8.1 ; U3.8 94.135,77.25 94.005,77.379 91.495,77.379 91.319,77.204 91.319,75.982 C8.1 ; U3.23 U3.23@102.288,73.724 ; U3.35 105.307,80.25 105.41,80.352 105.523,80.352 v1@105.525,80.35 ; v1(105.525,80.4) 105.927,80.802 C7.1 C7.1@106.599,80.9 ; C7.1@106.8,80.725 107.23,81.155 ; v1(108.625,66.925) 108.633,66.925 108.858,67.15 ACC.6
  Top Layer (Signal) w0.25: ACC.8 ACC.9 ; v1(111,65.925) ACC.9 ; ACC.10 ACC.9
  Top Layer (Signal) w0.3: C12.1@84.488,76.711 C12.1 ; C11.1@84.488,79.091 C11.1 ; NRST.2@85,64.775 NRST.2 ; NRST.4@85,69.225 NRST.4 ; C4.1 C4.1@93.512,80.789 ; C10.2@94.988,67.711 C10.2 ; C14.1 C14.1@116.231,68.93 ; U1.1 U1.1@124.016,75.3 ; C1.1 C1.1@126.47,78.922
  other v1: 90,60 93,60 96,60 99,60 102,60 105,60 108,60 111,60 114,60 117,60 120,60 123,60 126,60 129,60 132,60 88.5,63 91.5,63 94.5,63 106.5,63 109.5,63 130.5,63 133.5,63 136.5,63 87,66 90,66 105,66 135,66 88.5,69 91.5,69 94.5,69 97.5,69 133.5,69 136.5,69 87,72 90,72 93,72 135.95,73.2 126.025,75.3 126.425,77.5 87,78 94.5,81 109.5,81 87,84 93,84 105,84 108,84 114,84 91.5,87 94.5,87 103.5,87 109.5,87 112.5,87 115.5,87 93,90 96,90 102,90 105,90 111,90 114,90 117,90 120,90 88.5,93 91.5,93 94.5,93 97.5,93 100.5,93 103.5,93 106.5,93 124.5,93 127.5,93 130.5,93 133.5,93 90,96 123,96 126,96 129,96 132,96
HSE_IN: C11.2 U3.5 Y1.1 | length 12.2
  Top Layer (Signal) w0.25: C11.2 84.75,80.75 90.83,80.75 92.374,79.206 93.726,79.206 94.182,78.75 U3.5
HSE_OUT: R2.2 U3.6 | length 3.2
  Top Layer (Signal) w0.21: R2.2 93.927,78.5 94.177,78.25 U3.6
I2C1_SCL: ACC.11 R5.2 U3.42 | length 31.9
  Top Layer (Signal) w0.25: U3.42 100.275,82.263 100.275,83.11 101.014,83.849 v1(101.041,83.849) ; v1@101.048,83.849 R5.2 ; v1(112,65.4) 112,66 ACC.11
  Bottom Layer (Signal) w0.25: v1(101.041,83.849) 101.041,80.605 106.737,74.908 109.646,74.908 115.304,69.25 115.304,68.525 113.761,66.982 113.582,66.982 v1(112,65.4)
I2C1_SDA: ACC.16 R6.2 U3.43 | length 31.8
  Top Layer (Signal) w0.25: U3.43 99.75,83.701 99.883,83.833 v1(99.883,83.888) 99.921,83.926 99.921,84.223 R6.2 ; ACC.16 113.721,68.65 114.071,69 v1(114.7,69)
  Bottom Layer (Signal) w0.25: v1(99.883,83.888) 99.883,78.566 100.673,77.776 100.673,72.509 102.408,70.774 112.926,70.774 v1(114.7,69)
NetC1_2: C1.2 FB1.2 U1.3
NetC12_2: C12.2 R2.1 Y1.2 | length 8.4
  Top Layer (Signal) w0.21: C12.2 87.005,75.302 87.448,75.745 Y1.2@87.448,76.348 ; Y1.2@87.995,76.895 89.696,76.895 R2.1
  Top Layer (Signal) w0.25: Y1.2@87.5,76.4 Y1.2@87.975,76.875
NetD1_1: D1.1 F1.1 Q1.2
NetD2_1: 3V3.1 R1.2 | length 2
  Top Layer (Signal) w0.21: 3V3.1 84.801,93.949 R1.2
NetD3_1: D3.1 R4.2 | length 2
  Top Layer (Signal) w0.21: D3.1 84.75,88.052 R4.2
NetD4_1: LED2.1 R8.2 | length 2
  Top Layer (Signal) w0.21: LED2.1 84.802,85.948 R8.2
NetF1_2: F1.2 FB1.1
NetJ7_3: BOOT.3 R7.1 | length 30.5
  Top Layer (Signal) w0.21: v1(96.3,86.3) 96.365,86.3 96.665,86 R7.1
  Bottom Layer (Signal) w0.21: v1(96.3,86.3) 96.3,63.142 97.726,61.716 100.056,61.716 BOOT.3
NetJ7_4: BOOT.4 R3.1 | length 4.5
  Top Layer (Signal) w0.2: R3.1 100.1,66.5 BOOT.4
NRST: C10.1 NRST.1 NRST.3 SWD.10 U3.7 | length 79.3
  Top Layer (Signal) w0.21: C10.1 94.724,66.026 94.376,66.026 93.1,64.75 NRST.1 v1(92.975,70.971) 90.541,73.405 90.541,76.895 91.396,77.75 U3.7 ; v1(121,93.7) 121,91.94 SWD.10
  Bottom Layer (Signal) w0.21: v1(92.975,70.971) 88.516,75.43 88.516,88.248 94.844,94.576 94.844,94.844 96.134,96.134 118.566,96.134 v1(121,93.7)
PA4: ACC.3 U3.14 | length 14.5
  Top Layer (Signal) w0.25: U3.14 97.75,72.416 v1(98.181,71.985) ; v1(104.962,69) 108.179,69 108.529,68.65 ACC.3
  Bottom Layer (Signal) w0.25: v1(98.181,71.985) 98.181,71.95 101.131,69 v1(104.962,69)
PA8: ACC.7 U3.29 | length 24.4
  Top Layer (Signal) w0.25: U3.29 105.25,77.25 v1(106.3,76.2) ; ACC.7 110,65.354 110.1,65.254 v1(110.1,65.2)
  Bottom Layer (Signal) w0.25: v1(106.3,76.2) 108.887,76.2 115.681,69.406 115.681,68.227 112.25,64.796 110.545,64.796 110.141,65.2 v1(110.1,65.2)
PB0: GPIO.1 U3.18 | length 27.3
  Top Layer (Signal) w0.2: GPIO.1 97.9,91.31 v1(97.9,90) ; v1(98.943,72.043) 98.943,72.073 99.7,72.83 99.7,73.712 U3.18
  Bottom Layer (Signal) w0.2: v1(97.9,90) 97.9,73.085 v1(98.943,72.043)
PB1: GPIO.2 U3.19 | length 26.5
  Top Layer (Signal) w0.2: GPIO.2 98.7,93.05 v1(98.7,90.6) ; v1(99.742,72.053) 99.79,72.101 99.79,72.264 100.25,72.725 U3.19
  Bottom Layer (Signal) w0.2: v1(98.7,90.6) 98.7,73.104 99.742,72.062 v1(99.742,72.053)
PB10: GPIO.3 U3.21 | length 27.7
  Top Layer (Signal) w0.2: GPIO.3 99.7,94.59 v1(99.7,91.2) ; v1(100.949,71.28) 100.949,72.111 101.046,72.208 101.046,72.651 101.2,72.805 101.2,73.712 U3.21
  Bottom Layer (Signal) w0.2: v1(99.7,91.2) 99.304,90.804 99.304,78.647 100.321,77.63 100.321,71.908 v1(100.949,71.28)
PB11: GPIO.4 U3.22 | length 25.2
  Top Layer (Signal) w0.2: v1(100.7,91.8) 101.58,92.68 GPIO.4 ; v1(101.625,72.411) 101.625,72.479 101.75,72.603 U3.22
  Bottom Layer (Signal) w0.2: v1(100.7,91.8) 100.7,91.732 100.462,91.494 100.462,80.686 101.625,79.523 v1(101.625,72.411)
PC13: U3.2
PC14: U3.3
PC15: U3.4
SPI1_MISO: U3.16
SPI1_MOSI: U3.17
SPI1_NSS: U3.38
SPI1_SCK: U3.15
SPI2_MISO: U3.27
SPI2_MOSI: U3.28
SPI2_SCK: U3.26
STATUS_LED1: D3.2 U3.10 | length 20.1
  Top Layer (Signal) w0.2: D3.2 88.2,90 v1(90.2,88) ; v1(94.341,75.959) 94.408,75.959 94.699,76.25 U3.10
  Bottom Layer (Signal) w0.2: v1(90.2,88) 90.2,80.1 v1(94.341,75.959)
STATUS_LED2: LED2.2 U3.11 | length 16.5
  Top Layer (Signal) w0.2: LED2.2 87.3,86 v1(89.1,84.2) ; v1(94.36,75.197) 94.397,75.197 94.9,75.7 95.712,75.7 U3.11
  Bottom Layer (Signal) w0.2: v1(89.1,84.2) 89.1,80.381 94.101,75.38 94.109,75.38 94.292,75.197 v1(94.36,75.197)
SWCLK: SWD.4 U3.37 | length 20.4
  Top Layer (Signal) w0.2: U3.37 102.8,82.288 102.8,82.875 113.225,93.3 116.55,93.3 117.23,92.62 SWD.4
SWDIO: SWD.2 U3.34 | length 18.4
  Top Layer (Signal) w0.2: U3.34 106.635,79.75 115.68,88.795 115.68,91.62 SWD.2
SWO: SWD.6 U3.39 | length 23.5
  Top Layer (Signal) w0.2: U3.39 101.8,82.288 101.8,83.1 112.327,93.627 118.173,93.627 118.5,93.3 SWD.6
USART1_RX: U3.31 UART.3 | length 21.5
  Top Layer (Signal) w0.2: U3.31 106.493,78.25 v1(106.879,77.864) ; v1(109.152,92.3) 110,93.148 UART.3
  Bottom Layer (Signal) w0.2: v1(106.879,77.864) 106.879,90.027 v1(109.152,92.3)
USART1_TX: U3.30 UART.2 | length 21.2
  Top Layer (Signal) w0.2: U3.30 105.908,77.75 106.258,77.4 v1(106.3,77.4) ; UART.2 108.3,94.41 v1(108.3,93.1)
  Bottom Layer (Signal) w0.2: v1(106.3,77.4) 106.3,91.1 v1(108.3,93.1)
USART2_RX: U3.12
USART2_TX: U3.13
USB_CONN_D_N: J6.2 U2.1 | length 4
  Top Layer (Signal) w0.26: U2.1 131.304,86.175 131.619,86.49 131.746,86.49 131.939,86.683 131.939,86.741 132.091,86.893 132.775,86.893 132.825,86.943 133.74,86.943 133.763,86.92 134.565,86.92 J6.2
USB_CONN_D_P: J6.3 U2.3 | length 4
  Top Layer (Signal) w0.26: U2.3 131.304,88.075 131.619,87.76 131.746,87.76 131.939,87.567 131.939,87.509 132.091,87.357 132.583,87.357 132.633,87.407 133.74,87.407 133.763,87.43 134.565,87.43 J6.3
USB_DATA_N: U2.6 U3.32 | length 28
  Top Layer (Signal) w0.26: U3.32 104.256,78.768 112.119,78.768 120.244,86.893 127.509,86.893 127.661,86.741 127.661,86.683 127.854,86.49 127.981,86.49 128.296,86.175 U2.6
USB_DATA_P: U2.4 U3.33 | length 28
  Top Layer (Signal) w0.26: U3.33 104.256,79.232 111.927,79.232 120.052,87.357 127.509,87.357 127.661,87.509 127.661,87.567 127.854,87.76 127.981,87.76 128.296,88.075 U2.4
pads on no net: ACC.1 ACC.2 ACC.17 ACC.18 ACC.19 ACC.20 ACC.21 ACC.22 ACC.23 ACC.24 ACC.25 J6.4 J6.6 J6.7 J6.8 J6.9 J6.10 J6.11 SWD.7 SWD.8 U1.2 U3.25 U3.40 U3.41 U3.45 U3.46

## Polygon pours and split planes (outlines as drawn)
GND on Top Layer (Signal) "GND_L01_P020" (solid, pour order 20): 82.875,79.625 82.875,97.66 cw(c85.415,97.66) 85.415,100.2 135.76,100.2 cw(c135.76,97.66) 138.3,97.66 138.3,60.165 cw(c135.76,60.165) 135.76,57.625 85.315,57.625 cw(c85.315,60.165) 82.775,60.165 82.775,61.9
3V3 on Top Layer (Signal) "Top Layer (Signal)-3V3" (solid, pour order 18): 112.175,62.675 114.075,62.675 118.5,67.1 118.5,73.7 120.2,75.4 120.2,79.95 119.625,80.525 116.75,80.525 113.5,77.275 111.9,75.675 108.05,75.675 104.925,72.55 103.825,72.55 103.65,72.375 103.65,70.925 103.95,70.625 105.425,70.625 107.475,72.675 114,72.675 116.35,70.325 116.925,69.75 116.925,68.325 116.65,68.05 115.4,68.05 115.125,67.775 115.125,65.475 114.075,64.425 112.175,64.425 111.8,64.05 111.8,63.05
NetF1_2 on Top Layer (Signal) "NETF1_2_L01_P006" (solid, pour order 6): 128.225,78.525 127.575,77.875 127.575,76.725 128.175,76.125 131.95,76.125 132.825,77 132.825,77.825 132.3,78.35 130.025,78.35 129.85,78.525
NetC1_2 on Top Layer (Signal) "NETC1_2_L01_P007" (solid, pour order 7): 129.525,80.85 129.95,80.425 129.95,78.775 128.025,78.775 127.1,79.7 126,79.7 125.1,78.8 122.5,78.8 121.975,79.325 121.975,80.65 122.7,81.375 127.275,81.375 127.8,80.85
NetD1_1 on Top Layer (Signal) "NETD1_1_L01_P003" (solid, pour order 3): 134.375,77.9 134.925,77.35 134.925,76.244 135.45,75.719 136.694,75.719 137.25,76.275 137.25,78.05 134.675,80.625 133.025,80.625 132.65,81 130.4,81 130.225,80.825 130.225,79.425 130.475,79.175 133.1,79.175
12V on Top Layer (Signal) "12V_L01_P000" (solid, pour order 0): 128.05,65.125 126.45,63.525 122.55,63.525 120.875,65.2 120.875,70.225 123.025,72.375 125.975,72.375 126.025,72.375 127.05,73.35 129.25,75.55 131.975,75.55 132.3,75.825 133.175,76.7 134.388,76.7 134.8,76.288 134.8,75.15 134.375,74.725 133.65,74.125 133,73.55 132,72.6 130.275,72.6 128.05,70.375 128.05,69.025
GND on Int1 (GND) "GND_L02_P015" (solid, pour order 15): 82.875,79.625 82.875,97.66 cw(c85.415,97.66) 85.415,100.2 135.76,100.2 cw(c135.76,97.66) 138.3,97.66 138.3,60.165 cw(c135.76,60.165) 135.76,57.625 85.315,57.625 cw(c85.315,60.165) 82.775,60.165 82.775,61.9
GND on Bottom Layer (Signal) "GND_L04_P021" (solid, pour order 21): 82.875,79.625 82.875,97.66 cw(c85.415,97.66) 85.415,100.2 135.76,100.2 cw(c135.76,97.66) 138.3,97.66 138.3,60.165 cw(c135.76,60.165) 135.76,57.625 85.315,57.625 cw(c85.315,60.165) 82.775,60.165 82.775,61.9
3V3 on Int2 (PWR) "3V3_L03_P019" (solid, pour order 19): 82.875,79.625 82.875,97.66 cw(c85.415,97.66) 85.415,100.2 135.76,100.2 cw(c135.76,97.66) 138.3,97.66 138.3,60.165 cw(c135.76,60.165) 135.76,57.625 85.315,57.625 cw(c85.315,60.165) 82.775,60.165 82.775,61.9

## Silkscreen, mask and mechanical layers (free items; w line width, h text height)
Top Overlay:
  text "1" at 96.079,64.754 h1.12
  text "0" at 95.854,62.154 h1.12
  text "STM32 DEV BOARD by Harsha Sandirigama" at 88.47,58.623 h1.21
Mechanical 1:
  the board outline again, w0.3

## Text inside footprints (layer, text, board x,y; h text height)
ACC: Top Overlay "*" at 107.75,69 h1.27; Mechanical 13 "*" at 109.968,69.015 h1.27